# Altium PCB Tachometer-Board.PcbDoc
Units mil, origin at the board's own origin, x right, y up, seen from the top; angles counter-clockwise.
Board outline 3050 x 3346.46 mil, 2 copper layers (Top Layer, Bottom Layer); 35 components, 29 nets, 152 pads, 0 vias.
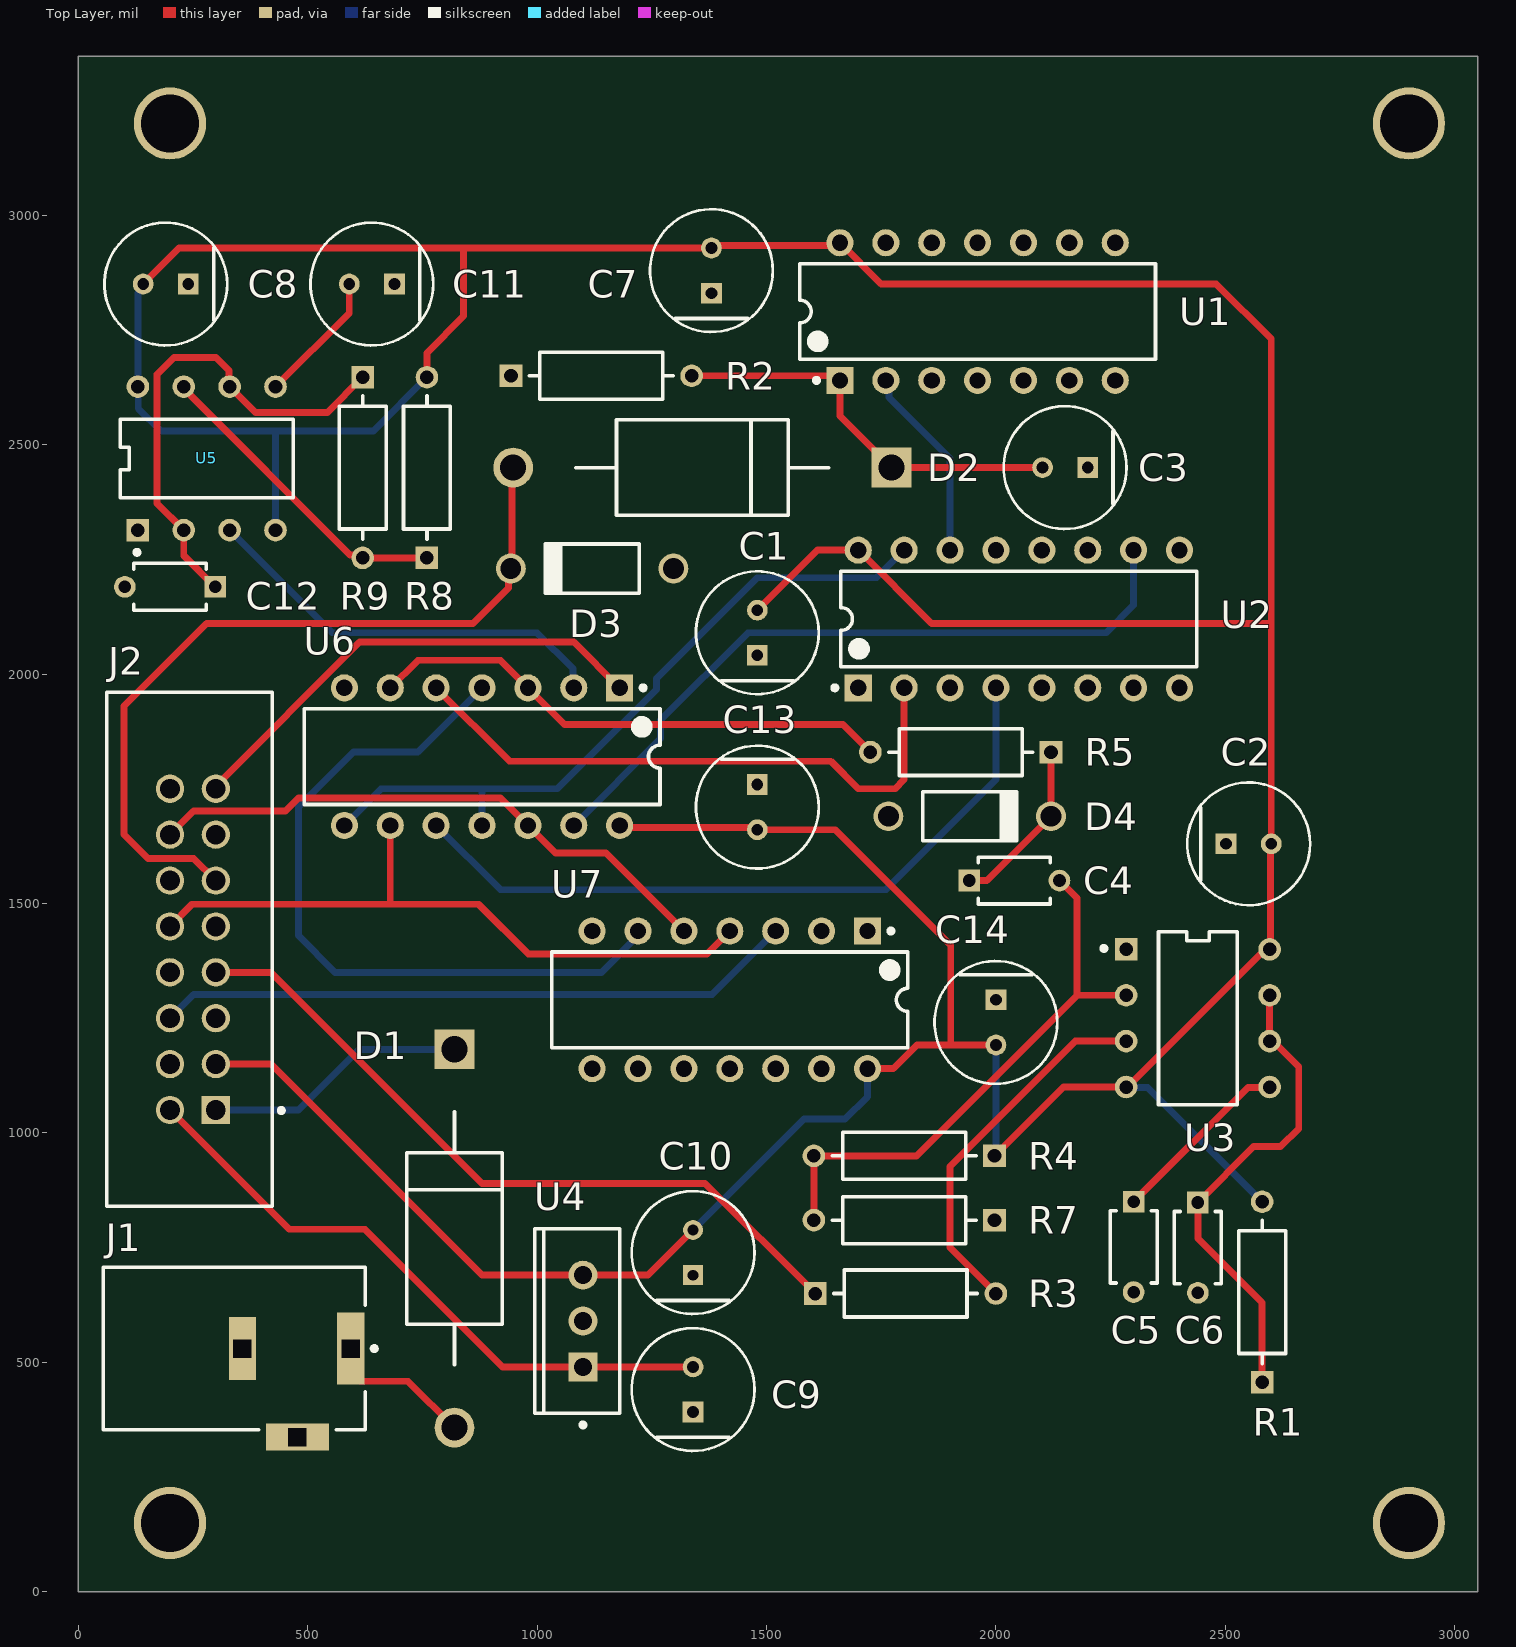
[diagram p0: Top Layer view]
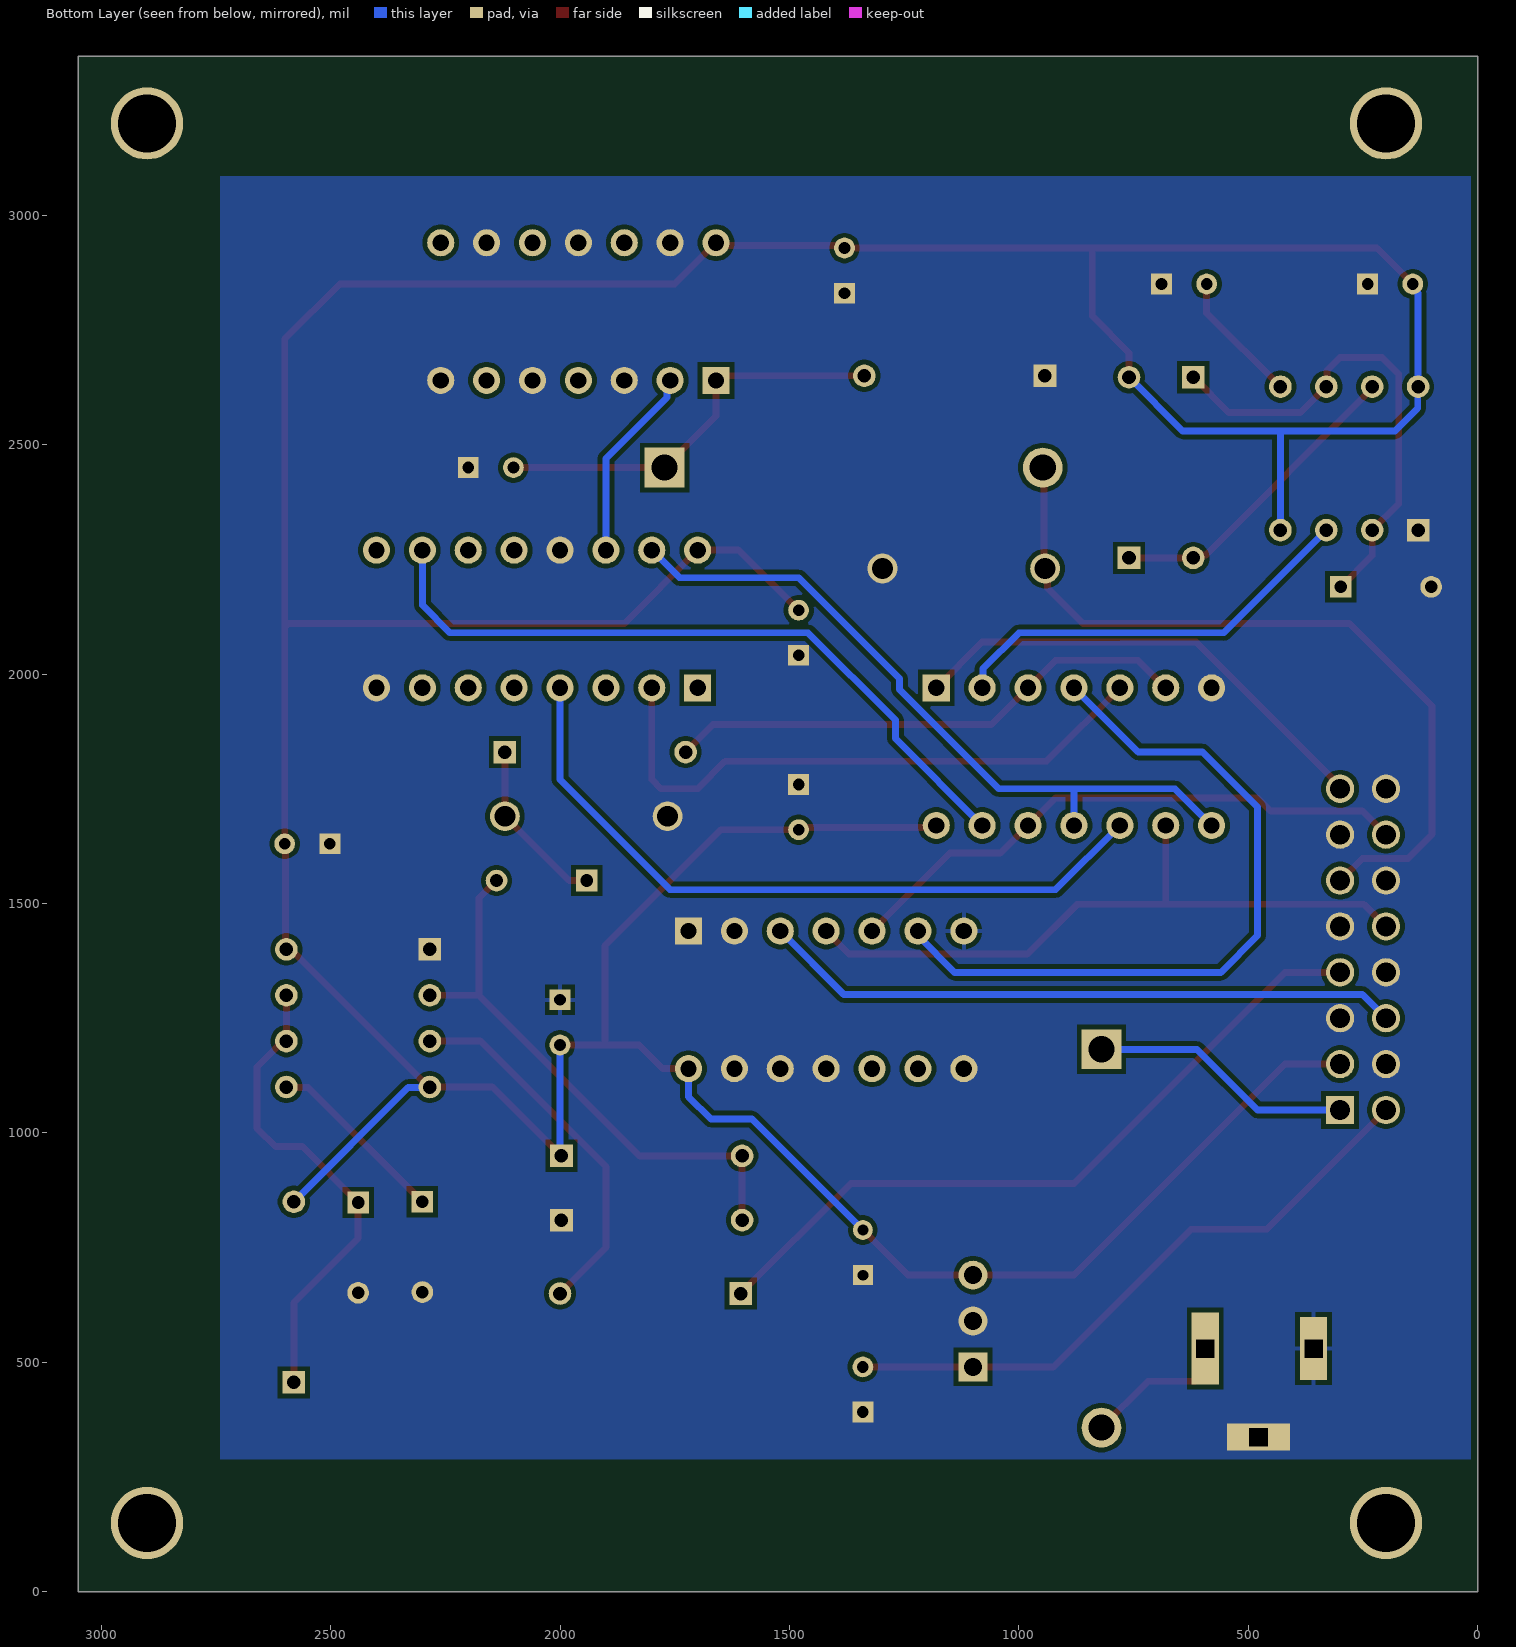
[diagram p1: Bottom Layer view, seen from below]
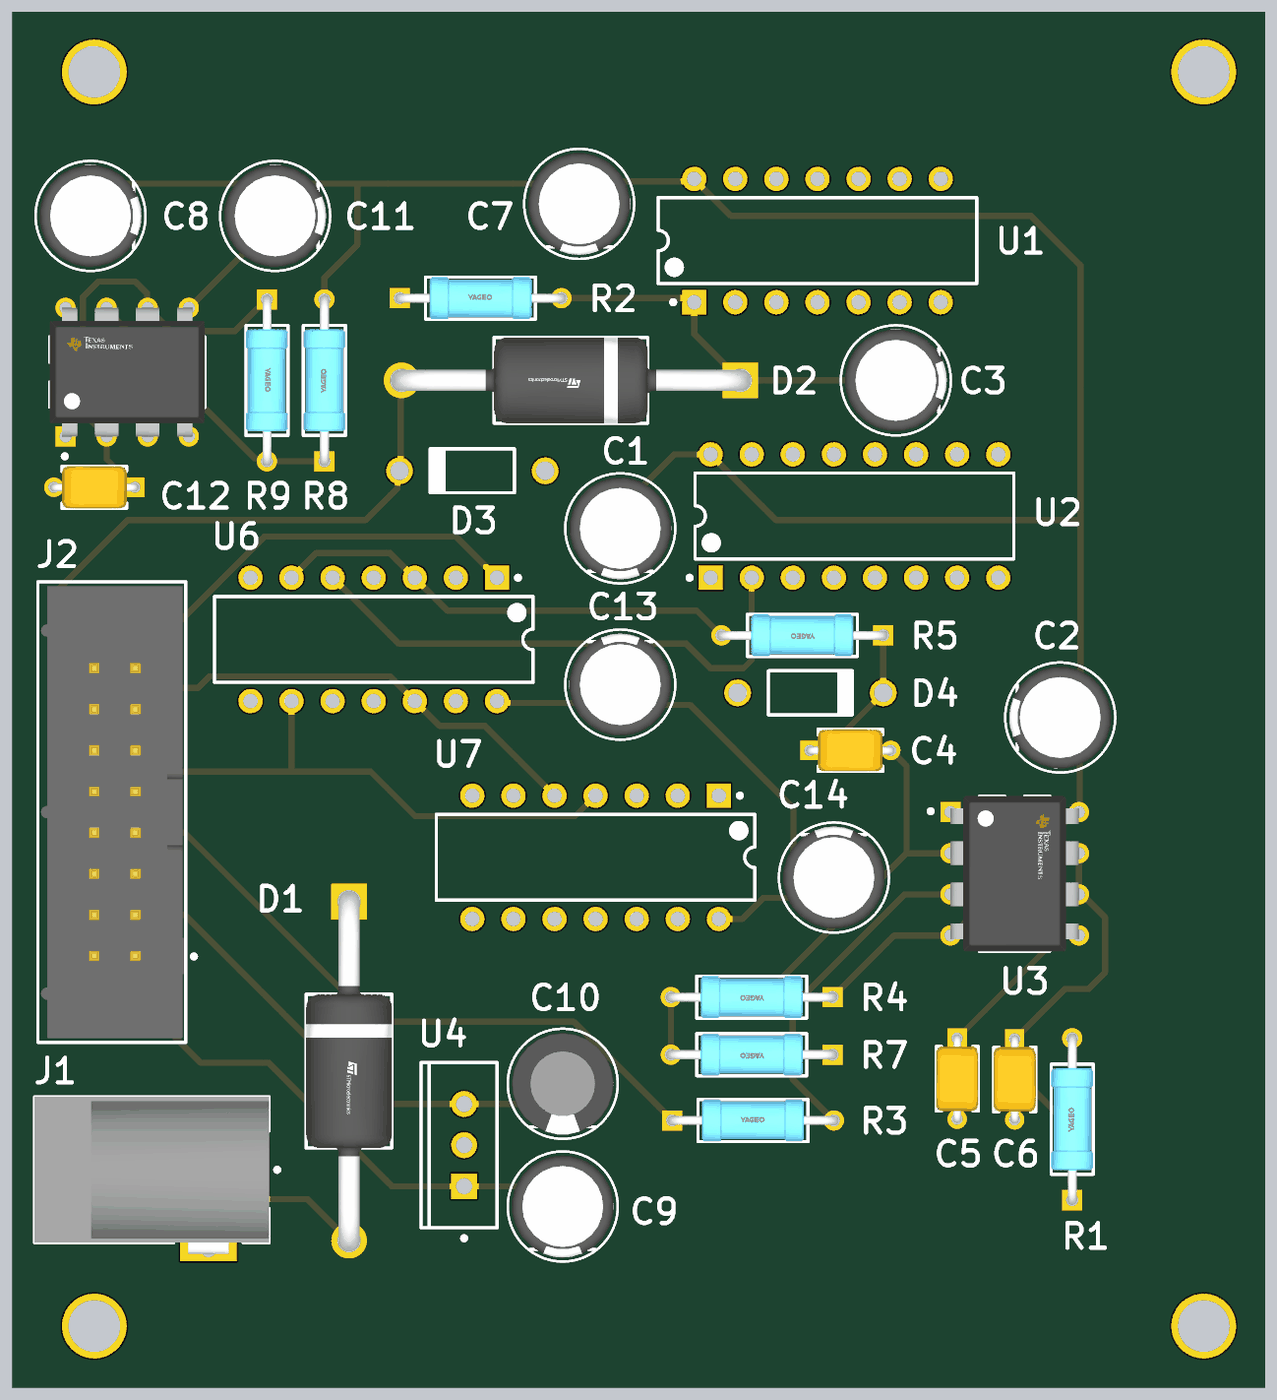
[diagram p2: 3D render of the assembled board from above, using the file's embedded part models]

## Layer stack, top to bottom
Top Solder: solder mask 0.4, Solder Resist, Dk 3.5
Top Layer: signal copper 1.4
Dielectric 1: dielectric 12.6, FR-4, Dk 4.8
Bottom Layer: signal copper 1.4
Bottom Solder: solder mask 0.4, Solder Resist, Dk 3.5

## Board outline
0,0 3050,0 3050,3346.46 0,3346.46

## Design rules (kind name [scope] priority, off if disabled: settings)
BoardOutlineClearance [All] p1: gap=15 ignorepadtopadclearanceinfootprint=FALSE
Clearance [All] p1: gap=10 ignorepadtopadclearanceinfootprint=FALSE except(0: Arc-Hole Track-Hole SMDPad-Hole THPad-Hole Via-Hole Fill-Hole Poly-Hole Region-Hole Text-Hole)
PolygonConnect [All] p1: connectstyle=Relief reliefconductorwidth=10 reliefentries=4 polygonreliefangle="90 Angle" airgapwidth=10
RoutingVias [All] p1: holewidth=28 width=50 viastyle="Through Hole" minholewidth=28 minwidth=50 maxholewidth=28 maxwidth=50
SolderMaskExpansion [All] p1: expansion=4 istentingtop=FALSE
Width [All] p1: maxlimit=20 minlimit=12 preferedwidth=15
30 further rules are at their usual default settings.

## Components (designator, comment, footprint, x,y, rotation, side; value= is the part's Value field where it differs from the comment)
C1 "10uF" FP-ESLE3-MFG 1480,2090 r90 top
C2 "10uF" FP-ESLE3-MFG 2550.79,1630 r0 top
C3 "0.1uF" FP-ESLE3-MFG 2150.79,2450 r180 top value=10uF
C4 "0.1uF" FP-K15H5-MFG 2040,1550 r0 top
C5 "0.1uF" FP-K15H5-MFG 2300,751.57 r270 top
C6 "0.1uF" FP-K15H5-MFG 2440,750 r270 top
C7 "10uF" FP-ESLE3-MFG 1380,2879.21 r90 top
C8 "10uF" FP-ESLE3-MFG 190.79,2850 r180 top
C9 "10uF" FP-ESLE3-MFG 1340,440.79 r90 top
C10 "100uF" FP-ZLG6_3X7-MFG 1340,739.21 r90 top
C11 "10uF" FP-ESLE3-MFG 640,2850 r180 top
C12 "0.1uF" FP-K15H5-MFG 200,2190 r180 top
C13 "10uF" FP-ESLE3-MFG 1480,1710 r270 top
C14 "10uF" FP-ESLE3-MFG 2000,1240.79 r270 top
D1 "1N4148" FP-DO-201AD-MFG 820,770 r270 top
D2 "1N4148" FP-DO-201AD-MFG 1360,2450 r180 top
D3 "1N4731A" FAIR-DO-41-2_V 1120,2230 r180 top
D4 "1N4731A" FAIR-DO-41-2_V 1942.83,1690 r0 top
J1 "NEB 21 R" LUMB-NEB21R_V 340,530 r270 top
J2 "30316-6002HB" FP-30316-6002HB-MFG 242.5,1400 r90 top
R1 "47K" FP-MFR-25-MFG 2580,653.15 r90 top value=1.18kΩ
R2 "10K" FP-MFR-25-MFG 1140,2650 r0 top value=1.18kΩ
R3 "100K" FP-MFR-25-MFG 1803.15,650 r0 top value=1.18kΩ
R4 "1K" FP-MFR-25-MFG 1800,950 r180 top value=1.18kΩ
R5 "1K" FP-MFR-25-MFG 1923.15,1830 r180 top value=1.18kΩ
R7 "4.7K" FP-MFR-25-MFG 1800,810 r180 top value=1.18kΩ
R8 "120K" FP-MFR-25-MFG 760,2450 r90 top value=1.18kΩ
R9 "180K" FP-MFR-25-MFG 620,2450 r270 top value=1.18kΩ
U1 "SN7414N" N0014A 1960,2790 r90 top
U2 "CD4017BE" N0016A 2050,2120 r90 top
U3 "LM555CN/NOPB" FP-P0008A-MFG 2440,1250 r0 top
U4 "LM7805CT" FAIR-TO-220-3 1100,590 r180 top
U5 "LM555CN/NOPB" FP-P0008A-MFG 280,2470 r90 top
U6 "SN74HC08N" N0014A 880,1820 r270 top
U7 "CD74HC4075E" N0014A 1420,1290 r270 top

## Footprints (in the part's own frame and the unit in brackets; to place one, negate y for a bottom-side part, rotate by r counter-clockwise, add the part's x,y. Pads: shape width x height; smd on the part's side, far side on the other; paste and mask are expansions set on the pad)
FAIR-DO-41-2_V [mm] "2-Leads, Axial leaded, Body 2.72x5.2mm, Pin Spacing 9mm"
  round 1.65 hole 1.15: 1(-4.5,0) 2(4.5,0)
  silkscreen extent -2.6,-1.36 2.6,1.36, body extent -4.93,-1.36 4.93,1.36, height 2.71
FAIR-TO-220-3 [mm] "FM, 3-Leads, Body 10.2x4.7mm, Pitch 2.54mm"
  rect 1.6x1.6 hole 1: 1(0,2.54)
  round 1.6 hole 1: 2(0,0) 3(0,-2.54)
  silkscreen extent -2.04,-5.1 2.66,5.87, body extent -2.04,-5.1 2.66,5.1, height 18.95
FP-30316-6002HB-MFG [mil]
  rect 61.65x61.65 hole 43 paste-39370.1 mask+0: 1(-350,-57.5)
  round 61.65 hole 43 paste-39370.1 mask+0: 2(-350,42.5) 3(-250,-57.5) 4(-250,42.5) 5(-150,-57.5) 6(-150,42.5) 7(-50,-57.5) 8(-50,42.5) 9(50,-57.5) 10(50,42.5) 11(150,-57.5) 12(150,42.5) 13(250,-57.5) 14(250,42.5) 15(350,-57.5) 16(350,42.5)
  silkscreen extent -560,-205 560,180, body extent -564,-184 564,184, height 10
FP-DO-201AD-MFG [mm]
  rect 2.2x2.2 hole 1.45 paste-1000 mask+0: 1(-10.47,0)
  round 2.2 hole 1.45 paste-1000 mask+0: 2(10.47,0)
  silkscreen extent -7,-2.65 7,2.65, body extent -11.67,-2.75 11.67,2.75, height 0.25
FP-ESLE3-MFG [mm]
  rect 1.15x1.15 hole 0.65 paste-1000 mask+0: 1(-1.25,0)
  round 1.15 hole 0.65 paste-1000 mask+0: 2(1.25,0)
  silkscreen extent -3.4,-3.4 3.4,3.4, body extent -3.5,-3.5 3.5,3.5, height 0.25
FP-K15H5-MFG [mm]
  rect 1.2x1.2 hole 0.7 paste-1000 mask+0: 1(-2.5,0)
  round 1.2 hole 0.7 paste-1000 mask+0: 2(2.5,0)
  silkscreen extent -2,-1.3 2,1.3, body extent -3.2,-1.4 3.2,1.4, height 0.25
FP-MFR-25-MFG [mm]
  rect 1.25x1.25 hole 0.75 paste-1000 mask+0: 1(-5,0)
  round 1.25 hole 0.75 paste-1000 mask+0: 2(5,0)
  silkscreen extent -3.98,-1.3 3.98,1.3, body extent -5.72,-1.4 5.72,1.4, height 0.25
FP-P0008A-MFG [mm]
  rect 1.25x1.25 hole 0.75 paste-1000 mask+0: 1(-3.97,3.81)
  round 1.25 hole 0.75 paste-1000 mask+0: 2(-3.97,1.27) 3(-3.97,-1.27) 4(-3.97,-3.81) 5(3.97,-3.81) 6(3.97,-1.27) 7(3.97,1.27) 8(3.97,3.81)
  silkscreen extent -5.32,-4.79 2.17,4.79, body extent -4.69,-5.18 4.69,5.18, height 0.25
FP-ZLG6_3X7-MFG [mm]
  rect 1.1x1.1 hole 0.6 paste-1000 mask+0: 1(-1.25,0)
  round 1.1 hole 0.6 paste-1000 mask+0: 2(1.25,0)
  silkscreen extent -3.4,-3.4 3.4,3.4, body extent -3.5,-3.5 3.5,3.5, height 0.25
LUMB-NEB21R_V [mm] "THD, 3-Leads, Body 14.5x9mm"
  rect 4x1.5 hole 1 square: 1(0,6.45)
  rect 1.5x3.5 hole 1 square: 2(4.9,3.5)
  rect 3.5x1.5 hole 1 square: 3(0,0.45)
  silkscreen extent -4.5,-7.25 4.5,7.88, body extent -4.5,-7.25 5.2,7.25, height 11
N0014A [mm] "DIP, 14-Leads, Body 19.7x6.6mm, Pitch 2.54mm"
  rect 1.5x1.5 hole 0.9: 1(-3.81,7.62)
  round 1.5 hole 0.9: 2(-3.81,5.08) 3(-3.81,2.54) 4(-3.81,0) 5(-3.81,-2.54) 6(-3.81,-5.08) 7(-3.81,-7.62) 8(3.81,-7.62) 9(3.81,-5.08) 10(3.81,-2.54) 11(3.81,0) 12(3.81,2.54) 13(3.81,5.08) 14(3.81,7.62)
  silkscreen extent -3.93,-9.85 2.65,9.85, body extent -3.95,-9.85 3.95,9.85, height 5.08
N0016A [mm] "DIP, 16-Leads, Body 19.7x6.6mm, Pitch 2.54mm"
  rect 1.5x1.5 hole 0.9: 1(-3.81,8.89)
  round 1.5 hole 0.9: 2(-3.81,6.35) 3(-3.81,3.81) 4(-3.81,1.27) 5(-3.81,-1.27) 6(-3.81,-3.81) 7(-3.81,-6.35) 8(-3.81,-8.89) 9(3.81,-8.89) 10(3.81,-6.35) 11(3.81,-3.81) 12(3.81,-1.27) 13(3.81,1.27) 14(3.81,3.81) 15(3.81,6.35) 16(3.81,8.89)
  silkscreen extent -3.93,-9.85 2.65,10.31, body extent -3.95,-9.85 3.95,9.85, height 5.08

## Part data
C1 C2 C7 C8 C9 C11 C13 C14: library part CMP-03015-000004-1, "CAP ALUM 10UF 20% 100V THRU HOLE", Leakage Current=10uA, Manufacturer=kemet, Manufacturer Part Number=ESL106M100AE3AA, Package=ESLE3, Ripple Current=280mA, Temperature="-40°C to +105°C", Temperature Range High=+105°C, Temperature Range Low=-40°C, Tolerance=20%, Voltage Rating=100V, Automotive=No, Capacitance=10uF, Category=Cap, ComponentLink2Description=Datasheet, ComponentLink2URL=https://content.kemet.com/datasheets/KEM_A4074_ESL.pdf, Device Class L1="Passive Components", Device Class L2=Capacitors, Device Class L3="Aluminum Electrolytic Capacitors", Digikey Description="CAP ALUM 10UF 20% 100V THRU HOLE", Dissipation Factor=9%, Esr=0.68Ω, Height=12.5mm, Lead Free=Yes, Life=10000Hours, Material=Aluminum, Mouser Description="Cap, 10UF, 100V, Alu Elec, Radial", Octopart=https://octopart.com/esl106m100ae3aa-kemet-84758885, RoHS=TRUE
C3: library part CMP-03015-000004-1, "CAP ALUM 10UF 20% 100V THRU HOLE", Capacitance=10uF, Leakage Current=10uA, Manufacturer=kemet, Manufacturer Part Number=ESL106M100AE3AA, Package=ESLE3, Ripple Current=280mA, Temperature="-40°C to +105°C", Temperature Range High=+105°C, Temperature Range Low=-40°C, Tolerance=20%, Voltage Rating=100V, Automotive=No, Category=Cap, ComponentLink2Description=Datasheet, ComponentLink2URL=https://content.kemet.com/datasheets/KEM_A4074_ESL.pdf, Device Class L1="Passive Components", Device Class L2=Capacitors, Device Class L3="Aluminum Electrolytic Capacitors", Digikey Description="CAP ALUM 10UF 20% 100V THRU HOLE", Dissipation Factor=9%, Esr=0.68Ω, Height=12.5mm, Lead Free=Yes, Life=10000Hours, Material=Aluminum, Mouser Description="Cap, 10UF, 100V, Alu Elec, Radial", Octopart=https://octopart.com/esl106m100ae3aa-kemet-84758885, RoHS=TRUE
C4 C5 C6 C12: library part CMP-02417-000048-1, "CAP CER 0.1UF 50V X7R RADIAL", Capacitance=100nF, Case/Package=Dipped, Dielectric=X7R, Max Operating Temperature=125°C, Min Operating Temperature=-55°C, Package Quantity=5000, Tolerance=10%, Voltage=50V, Construction=RADIAL, Depth=2.5mm, Diameter=500um, Height=4mm, Height - Seated (Max)=0.1inch, Lead Diameter=0.5mm, Lead Length=30mm, Lead Pitch=5mm, Lead/Base Style="Formed Leads", Length=4mm, Mount="Through Hole", Packaging=Bulk, Radiation Hardening=No, RoHS Compliant=Yes, Series=K, Termination=Radial, Thickness=2.6mm, Voltage Rating=50V, Voltage Rating (DC)=50V, Weight=0.005644oz, Width=2.5mm
C10: library part CMP-35376-000006-1, "CAP ALUM 100UF 20% 10V RADIAL", Leakage Current=30uA, Manufacturer=Rubycon, Manufacturer Part Number=10ZLG100MEFC6.3X7, Package=ZLG6.3X7, Ripple Current=480mA, Temperature="-40°C to +105°C", Temperature Range High=+105°C, Temperature Range Low=-40°C, Tolerance=20%, Voltage Rating=10V, Automotive=No, Capacitance=100uF, Category=Cap, ComponentLink2Description=Datasheet, ComponentLink2URL=http://www.rubycon.co.jp/en/catalog/e_pdfs/aluminum/e_zlg.pdf, Device Class L1="Passive Components", Device Class L2=Capacitors, Device Class L3="Aluminum Electrolytic Capacitors", Digikey Description="CAP ALUM 100UF 20% 10V RADIAL", Dissipation Factor=19%, Height=8mm, Lead Free=Yes, Life=1000Hours, Material=Aluminum, Octopart=https://octopart.com/10zlg100mefc6.3x7-rubycon-19991480, RoHS=TRUE
D1 D2: library part CMP-12187-000025-1, "DIODE SCHOTTKY 40V 3A DO201AD", Forward Current=3A, Manufacturer=STMicroelectronics, Manufacturer Part Number=1N5822, Max Junction Temp=+150°C, Max Repetitive Reverse Voltage=40V, Max Surge Forward Current=80A, Package=DO-201AD, Peak Reverse Current=2mA, Temperature="to +150°C", Automotive=No, Category=Diode, ComponentLink2Description=Datasheet, ComponentLink2URL=https://www.st.com/resource/en/datasheet/1n5822.pdf, Device Class L1="Discrete Semiconductors", Device Class L2=Diodes, Device Class L3="Schottky Diodes", Digikey Description="DIODE SCHOTTKY 40V 3A DO201AD", Height=5.3mm, Lead Free=Yes, Mouser Description="Schottky Diodes & Rectifiers Vr/40V Io/3A BULK", Octopart=https://octopart.com/1n5822-stmicroelectronics-323225, RoHS=TRUE, Temperature Range High=+150°C
D3 D4: library part CMP-0892-00031-1, "Zener Diode, 4.3V, 1W, 5%, -65 to 200 degC, 2-Pin DO-41, Body 2.72 x 5.2 mm, RoHS", Manufacturer="Fairchild Semiconductor", Operating and Storage Temperature Range="-65 to 200 degC", Test Current IZ (mA)=58, Tolerance=5%, ComponentLink1Description="Manufacturer URL", ComponentLink1URL=http://www.fairchildsemi.com/, ComponentLink2Description=Datasheet, ComponentLink2URL=http://www.fairchildsemi.com/ds/1N/1N4744A.pdf, ComponentLink3Description="Package Specification", ComponentLink3URL=http://www.fairchildsemi.com/dwg/DO/DO41A.pdf, DatasheetVersion="Rev. H3", IR (uA)=10, Mounting Technology="Through Hole", PackageDescription="2-Pin Axial leaded, Body 2.72 x 5.2 mm, Lead Spread 25.4 mm", PackageReference=DO-41-2, PackageVersion="Rev. 2", PartNumber=1N4731A, PD (W)=1, RoHS=TRUE, VZ (Max.) (V)=4.515, VZ (Min.) (V)=4.085, ZZ (Max) (ohm)=9
J1: library part CMP-2000-06841-1, "Jack Socket, Body 14.5 x 9 mm, Height 11 mm, -20 to 70 degC, 3-Pin THD, RoHS, Bulk", Current Rating=3A, Manufacturer=Lumberg, Maximum Operating Temperature=+70°C, Minimum Operating Temperature=-20°C, Package Description="3-Pin Through Hole Device, Body 14.5 x 9 mm, Height 11 mm", Package Reference=NEB21R, Voltage Rating=12Vdc, Body Orientation=RightAngle, Datasheet URL=https://datasheet.ciiva.com/11720/0900766b805694d6-11720273.pdf, Datasheet Version=12/2004, Manufacturer URL=http://www.lumberg.com/, Mounting Technology=ThroughHole, Mounting Type=ThroughHole, Plug/Socket=Socket, Termination Method=Solder
J2: library part CMP-05379-000007-1, "CONN HEADER VERT 16POS 2.54MM", Current Rating=1A, Manufacturer=3M, Temperature="-55°C to +105°C", Temperature Range High=+105°C, Temperature Range Low=-55°C, Automotive=No, Category=Conn, ComponentLink2Description=Datasheet, ComponentLink2URL=https://multimedia.3m.com/mws/media/22504O/3mtm-100-in-loprof-hdr-100x-100strt-ra-4-wall-ts0818.pdf, Conn Gender=Male, Conn Orientation=Straight, Contact Material=Gold,Nickel, Device Class L1=Connectors, Device Class L2="Headers and Wire Housings", Device Class L3=unset, Digikey Description="CONN HEADER VERT 16POS 2.54MM", Height=0.375inch, Lead Free=Yes, Manufacturer Part Number=30316-6002HB, Mouser Description="Conn Shrouded Header (4 Sides) HDR 16 POS 2.54mm Solder ST Thru-Hole Box", Number Of Contacts=16, Number Of Rows=2, Octopart=https://octopart.com/30316-6002hb-3m-653367, Package=30316-6002HB, Pitch=2.54mm, RoHS=TRUE, Standoff Height=0.01inch
R1 R2 R3 R4 R5 R7 R8 R9: library part CMP-03413-000001-1, "RES 1.18K OHM 1/4W 1% AXIAL", Manufacturer=Yageo, Manufacturer Part Number=MFR-25FBF52-1K18, Package=MFR-25, Power Rating=0.25W, Resistance=1.18kΩ, Temperature="-55°C to +155°C", Temperature Coefficient=100ppm/°C, Temperature Range High=+155°C, Temperature Range Low=-55°C, Tolerance=1%, Voltage Rating=250V, Automotive=No, Category=Res, ComponentLink2Description=Datasheet, ComponentLink2URL=https://www.yageo.com/upload/media/product/products/datasheet/lr/Yageo_LR_MFR_1.pdf, Composition="Metal Film", Device Class L1="Passive Components", Device Class L2=Resistors, Device Class L3="Through-Hole Resistors", Digikey Description="RES 1.18K OHM 1/4W 1% AXIAL", Height=2.6mm, Ipc Land Pattern Name=RESAD1000W75L680D260, Lead Free=Yes, Mouser Description="Metal Film Resistors 1.18K OHM 1/4W 1%", Octopart=https://octopart.com/mfr-25fbf52-1k18-yageo-56251681, RoHS=TRUE, Series=MFR
U1: library part CMP-1615-00881-3, "Hex schmitt-trigger inverters, N0014A, TUBE", F @ Nom Voltage(Max)(Mhz)=35, Generic Part Number=SN7414, ICC @ Nom Voltage(Max)(mA)=0.06, Manufacturer="Texas Instruments", Operating Temperature Range(C)="0 to 70", Rating=Catalog, tpd @ Nom Voltage(Max)(ns)=22, Voltage(Nom)(V)=5, Bits(#)=6, Code_JEDEC=MS-001, DatasheetVersion=SDLS049B, Input Type=TTL, Output Drive (IOL/IOH)(Max)(mA)=-0.8/16, Output Type=CMOS, PackageReference=N0014A, Schmitt Trigger=Yes, Technology Family=TTL, VCC(Max)(V)=5.25, VCC(Min)(V)=4.75
U2: library part CMP-1623-00541-2, "CMOS Decade Counter with 10 Decoded Outputs, N0016A, TUBE", F @ Nom Voltage(Max)(Mhz)=8, Generic Part Number=CD4017B, ICC @ Nom Voltage(Max)(mA)=0.03, Manufacturer="Texas Instruments", Operating Temperature Range(C)="-55 to 125", Rating=Military, tpd @ Nom Voltage(Max)(ns)=270, Voltage(Nom)(V)=10, Bits(#)=10, Code_JEDEC=MS-001, DatasheetVersion=SCHS027C, Function=Counter, Input Type=CMOS, Inputs=1, Output Drive (IOL/IOH)(Max)(mA)=1.5/-1.5, Output Type=CMOS, PackageReference=N0016A, Schmitt Trigger=No, Technology Family=CD4000, Type=Decade, VCC(Max)(V)=18, VCC(Min)(V)=3
U3 U5: library part CMP-0056-00016-4, "IC OSC SINGLE TIMER 100KHZ 8-DIP", Ambient Temperature Range High=+70°C, Ambient Temperature Range Low=0°C, Manufacturer="Texas Instruments", Max Supply Voltage=16V, Min Supply Voltage=4.5V, Nominal Supply Current=3mA, Package=P0008A, Temperature="0°C to +70°C", Automotive=No, Category=IC, ComponentLink2Description=Datasheet, ComponentLink2URL=http://www.ti.com/lit/ds/symlink/lm555.pdf, Device Class L1="Integrated Circuits (ICs)", Device Class L2="Clock and Timing", Device Class L3="Timers and Oscillators", Digikey Description="IC OSC SINGLE TIMER 100KHZ 8-DIP", Height=5.08mm, Lead Free=Yes, Manufacturer Part Number=LM555CN/NOPB, Max Junction Temp=+70°C, Number Of Timers/Counters=1, Octopart=https://octopart.com/lm555cn%2Fnopb-texas+instruments-24814897, RoHS=TRUE, Standoff Height=0.51mm, Temperature Range High=+70°C, Temperature Range Low=0°C
U4: library part CMP-2000-04938-1, "Positive Voltage Regulator, 5 V, 1 A, -40 to 125 degC, 3-Pin TO-220, RoHS, Tube", Manufacturer=FairchildSemiconductor, Maximum Input Voltage=35V, Maximum Output Current=2.2(Typ)A, Maximum Quiescent Current=8mA, Operating Temperature=-40to125degC, Output Voltage=5V, Package=3TO-220AB, Package Description="3-Pin Through Hole Device, Body 10 x 4.5 mm, Pitch 2.54 mm", Package Reference=TO-220, Typical Dropout Voltage @ Current=2@1AV, Accuracy=±4%, Category=LinearRegulator, Datasheet URL=https://datasheet.ciiva.com/26904/lm7805ct-26904988.pdf, Datasheet Version=Aug-12, Line Regulation=100mV, Load Regulation=100mV, Manufacturer URL=https://www.fairchildsemi.com/, Mounting=ThroughHole, Number of Outputs=1, Output Type=Fixed, Package URL=https://www.fairchildsemi.com/package-drawings/TO/TO220B03.pdf, Packaging=Rail/Tube, Polarity=Positive, Rad Hard=No, Type=Linear
U6: library part CMP-0777-00250-3, "Quadruple 2-Input Positive-AND Gates, N0014A, TUBE", F @ Nom Voltage(Max)(Mhz)=70, Generic Part Number=SN74HC08, ICC @ Nom Voltage(Max)(mA)=0.02, Manufacturer="Texas Instruments", Operating Temperature Range(C)="-40 to 85", Rating=Catalog, tpd @ Nom Voltage(Max)(ns)=28, Voltage(Nom)(V)=5, Bits(#)=4, DatasheetVersion=SCLS081F, Input Type=CMOS, Output Type=CMOS, PackageReference=N0014A, Schmitt Trigger=No, Technology Family=HC, VCC(Max)(V)=6, VCC(Min)(V)=2
U7: library part CMP-1573-00141-3, "High Speed CMOS Logic Triple 3-Input OR Gates, N0014A, TUBE", F @ Nom Voltage(Max)(Mhz)=70, Generic Part Number=CD74HC4075, ICC @ Nom Voltage(Max)(mA)=0.02, Manufacturer="Texas Instruments", Operating Temperature Range(C)="-55 to 125", Rating=Catalog, tpd @ Nom Voltage(Max)(ns)=25, Voltage(Nom)(V)=5, Bits(#)=3, Code_JEDEC=MS-001, DatasheetVersion=SCHS210G, Input Type=CMOS, Output Drive (IOL/IOH)(Max)(mA)=5.2/-5.2, Output Type=CMOS, PackageReference=N0014A, PackageVersion=http://www.ti.com/lit/ml/mpdi002c/mpdi002c.pdf, VCC(Max)(V)=6, VCC(Min)(V)=2

## Free pads (board coordinates)
  round 157.48 hole 125.98 unplated: 2(200,150) 2(200,3200) 2(2900,150) 2(2900,3200)

## Nets (pads, with @x,y where several pads share a name; then routed paths per layer and width w, separated by ;. In a path a pad name is that pad's centre, name@x,y a point inside that pad or via, vN(x,y) a via of type N, cw(c..) or ccw(c..) an arc to the next point about the centre after c; other vN are vias at no path point)
+5V: C1.2 C2.2 C7.2 C8.2 C10.2 C13.2 C14.2 J2.3 R1.2 R4.1 R8.2 U1.14 U2.16 U3.4 U3.8 U4.3 U5.4 U5.8 U6.14 U7.14 | length 11265
  Top Layer w15: C8.2 220,2928.43 C7.2 1385.79,2934.21 1654.21,2934.21 U1.14 1750,2850 2480,2850 2600,2730 2600,2101.21 ; J2.3 420,1150 880,690 U4.3 1241.57,690 C10.2 ; R8.2 760,2700 840,2780 840,2920 ; U6.14 1184.61,1665.39 1475.39,1665.39 C13.2 1649.21,1660.79 1901.57,1408.43 1901.57,1191.57 ; C1.2 1610.79,2270 U2.16 1860,2110 2591.21,2110 2600,2101.21 ; U7.14 1776.32,1140 1827.9,1191.57 1901.57,1191.57 ; R4.1 2146.85,1100 U3.4 2286.85,1100 2573.27,1386.42 2573.46,1386.42 2587.04,1400 U3.8 2598.15,1401.85 2598.15,1628.15 C2.2 2600,2101.21 ; C14.2 1901.57,1191.57
  Bottom Layer w15: C8.2 141.57,2841.81 130,2830.23 U5.8 130.81,2625.49 130.81,2579.19 180,2530 428.43,2530 ; U5.4 430,2528.43 428.43,2530 ; R8.2 643.15,2530 428.43,2530 ; C10.2 1581.57,1030 1671.21,1030 1720,1078.79 U7.14 ; R4.1 2000,953.15 C14.2 ; U3.4 2284.51,1099.19 2330.81,1099.19 R1.2
BOX_ON: C9.2 J2.2 U4.1 | length 1372
  Top Layer w15: J2.2 460,790 624.64,790 924.64,490 U4.1 C9.2
CAL_SELECT: J2.15 U6.1 | length 1057.8
  Top Layer w15: J2.15 300,1756.51 613.49,2070 1080,2070 U6.1
CALIBRATION: U5.3 U6.2 | length 915.8
  Bottom Layer w15: U5.3 553.7,2090 780,2090 1000,2090 1078.21,2011.79 1078.21,1971.79 U6.2
DIV2_SELECT: J2.10 U6.9 U7.4 | length 1477.3
  Top Layer w15: J2.10 248.33,1498.33 680,1498.33 ; U6.9 680,1498.33 ; U7.4 1370,1390 980.88,1390 872.55,1498.33 680,1498.33
DIV4_SELECT: J2.14 U6.12 U7.5 | length 1273.3
  Top Layer w15: J2.14 251.67,1701.67 279.98,1701.67 451.67,1701.67 480,1730 920,1730 U6.12 1040,1610 1150,1610 U7.5
DIVIDE2: U2.4 U6.10 | length 1577.4
  Bottom Layer w15: U6.10 920,1530 1760,1530 2000,1770 U2.4
DIVIDE4: U2.10 U6.13 | length 1562.7
  Bottom Layer w15: U6.13 1269.27,1859.27 1269.27,1900.08 1459.19,2090 2240,2090 2300,2150 U2.10
ENGINE_INPUT: D2.2 D3.2 J2.11 | length 1732.3
  Top Layer w15: J2.11 251.67,1598.33 151.67,1598.33 100,1650 100,1930 280,2110 860,2110 937.54,2187.54 937.54,2224.71 945.32,2232.48 945.32,2447.52 D2.2
ENGINE_SELECT: J2.6 U7.3 | length 1398.7
  Bottom Layer w15: J2.6 251.67,1301.67 1381.67,1301.67 U7.3
EXT_POT: J2.7 R3.1 | length 1596.2
  Top Layer w15: J2.7 420,1350 880,890 1366.3,890 R3.1
FILTERED: U2.2 U6.5 | length 1319.4
  Top Layer w15: U6.5 940,1810 1640,1810 1700,1750 1780,1750 1800,1770 U2.2
GND: C1.1 C2.1 C3.1 C5.2 C6.2 C7.1 C8.1 C9.1 C10.1 C11.1 C12.2 C13.1 C14.1 D3.1 D4.1 J1.2 J1.3 J2.4 J2.5 J2.8 J2.9 J2.12 J2.13 J2.16 R2.1 R7.1 U1.3 U1.5 U1.7 U1.9 U1.11 U1.13 U2.8 U2.13 U3.1 U4.2 U5.1 U6.7 U7.1 U7.2 U7.7 U7.8 U7.11 U7.12 U7.13
NetC3_2: C3.2 D2.1 R2.2 U1.1 | length 893.1
  Top Layer w15: R2.2 1650,2650 U1.1 1660,2562.2 D2.1 C3.2
NetC4_1: C4.1 D4.2 R5.1 | length 376.4
  Top Layer w15: C4.1 1980,1550 D4.2 R5.1
NetC4_2: C4.2 R4.2 R7.2 U3.2 | length 1231.4
  Top Layer w15: R7.2 R4.2 1826.74,950 2176.74,1300 ; C4.2 2176.74,1511.69 2176.74,1300 ; U3.2 2176.74,1300
NetC5_1: C5.1 U3.5 | length 399.9
  Top Layer w15: C5.1 2549.19,1099.19 2595.49,1099.19 U3.5
NetC6_1: C6.1 R1.1 U3.6 U3.7 | length 1057.5
  Top Layer w15: R1.1 2580,630 2440,770 C6.1 2561.57,970 2620,970 2660,1010 2660,1143.33 2603.33,1200 U3.6 U3.7
NetC11_2: C11.2 U5.5 | length 292.9
  Top Layer w15: U5.5 590.79,2787.09 C11.2 C11.2@592.64,2848.15
NetD1_2: D1.2 J1.1 | length 326.2
  Top Layer w15: J1.1 593.94,480.79 615.96,458.76 719.04,458.76 D1.2
NetM1_2: 
NetR3_2: R3.2 U3.3 | length 815.3
  Top Layer w15: R3.2 1900,750 1900,927.11 2172.89,1200 U3.3
NetR8_1: R8.1 R9.2 U5.7 | length 687.1
  Top Layer w15: U5.7 230,2621.96 592.26,2259.7 613.45,2259.7 R9.2 R8.1
NetU6_4: U6.4 U7.6 | length 1604
  Bottom Layer w15: U6.4 740,1830 600,1830 480,1710 480,1430 560,1350 1140,1350 1220,1430 U7.6
RESET: U2.15 U6.8 U6.11 | length 1562.5
  Bottom Layer w15: U6.8 660,1750 880,1750 ; U6.11 880,1750 ; U2.15 1740,2210 1480,2210 1260,1990 1260,1966.2 1043.8,1750 880,1750
SCHMITT: U1.2 U2.14 | length 428
  Bottom Layer w15: U1.2 1766.79,2633.21 1766.79,2603.21 1900,2470 U2.14
TACH_INPUT: R5.2 U6.3 U6.6 | length 1154
  Top Layer w15: U6.6 740,2030 920,2030 U6.3 1060,1890 1666.3,1890 R5.2
TRIGGER: C12.1 R9.1 U5.2 U5.6 | length 1084.5
  Top Layer w15: C12.1@295.28,2186.85 C12.1 230,2258.43 U5.2 172.11,2371.59 172.11,2653.32 208.79,2690 300,2690 328.54,2661.46 328.54,2627.76 386.3,2570 543.15,2570 R9.1
VCC: D1.1 J2.1 | length 574.8
  Bottom Layer w15: J2.1 480,1050 612.2,1182.2 D1.1
pads on no net: U1.4 U1.6 U1.8 U1.10 U1.12 U2.1 U2.3 U2.5 U2.6 U2.7 U2.9 U2.11 U2.12 U7.9 U7.10

## Polygon pours and split planes (outlines as drawn)
GND on Bottom Layer "GND_L02_P000" (solid, pour order 0): 0,3084.65 2740,3084.65 2740,289.37 0,289.37